# EAGLE board KittyEarsV2 (EAGLE 8.7.0)
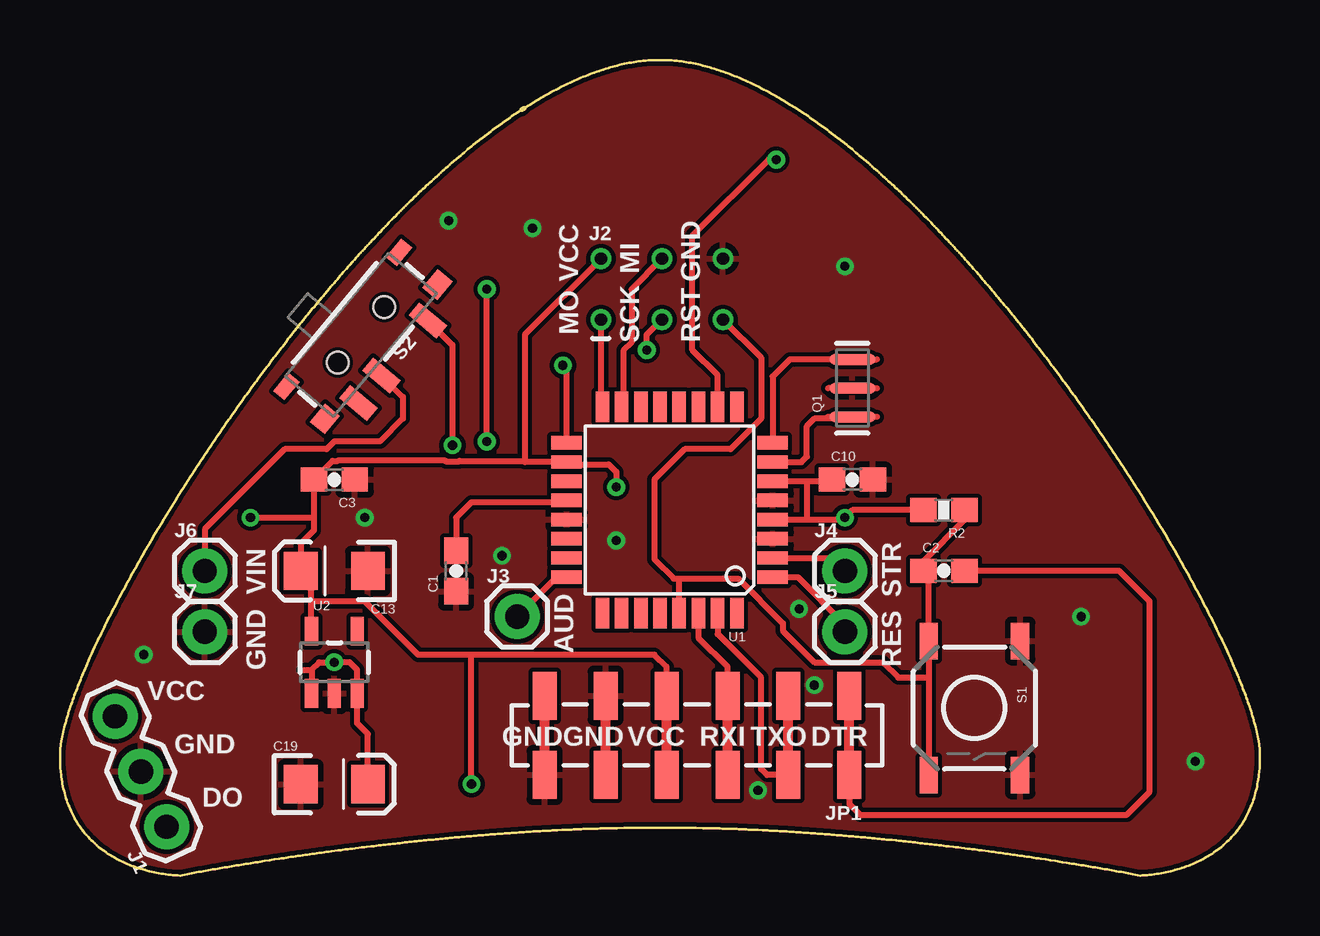
[diagram p0: board, top side]
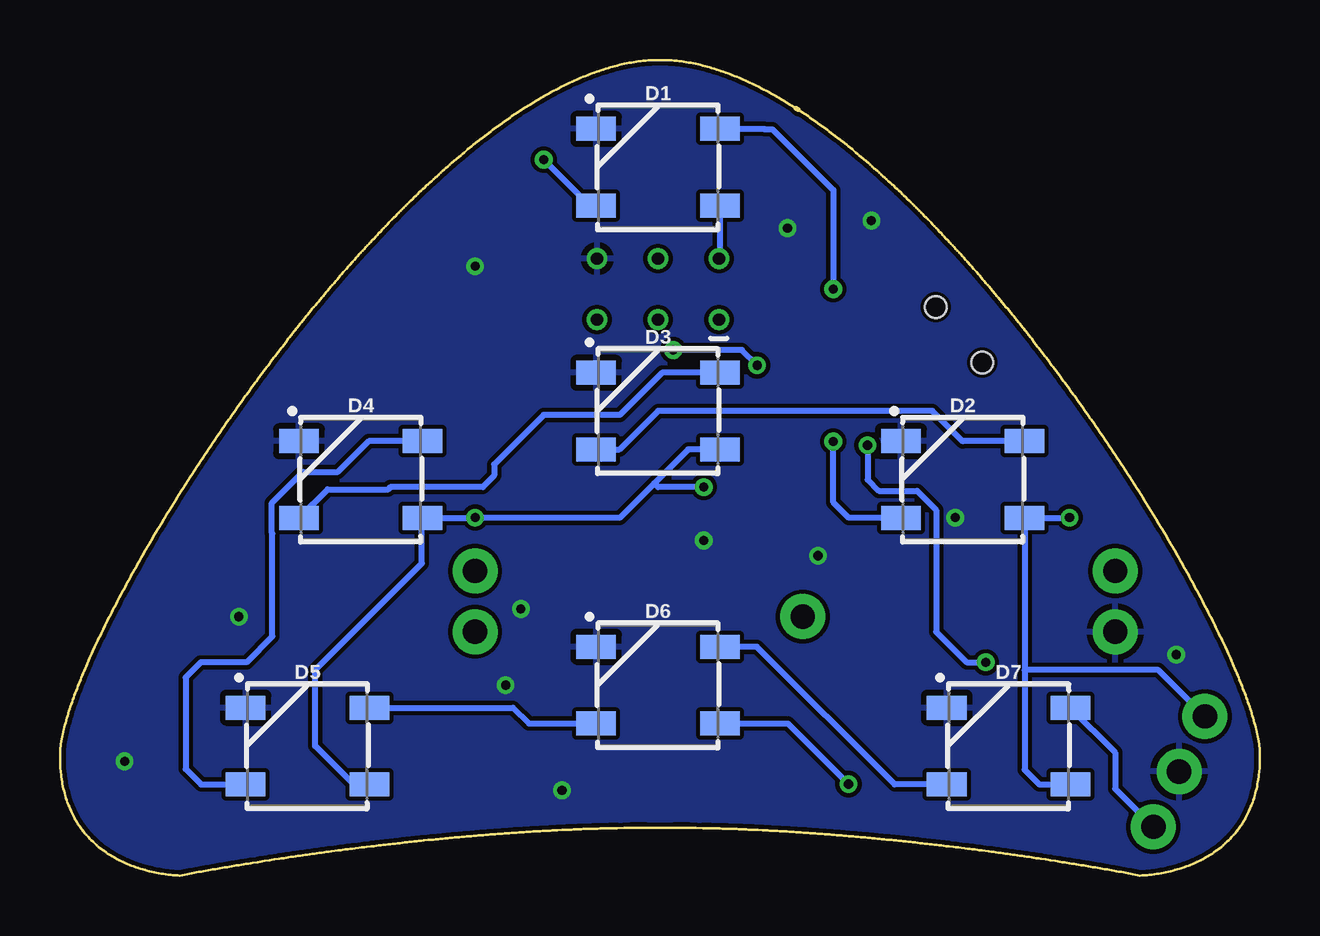
[diagram p1: board, bottom side, seen from below]

Size 50 x 34 mm. Coordinates in mm from the lower left corner, seen from the top.
Outline: 25.6,2 24.4,2 24.3,2 24.2,2 24.1,1.99 24,1.99 23.9,1.99 23.8,1.99 23.71,1.99 23.6,1.99 23.5,1.99 23.21,1.98 23.11,1.98 23.01,1.98 22.91,1.97 22.71,1.97 22.61,1.96 22.51,1.96 22.41,1.96 22.31,1.95 22.21,1.95 22.11,1.95 22.01,1.94 21.91,1.94 21.81,1.94 21.71,1.93 21.61,1.93 21.51,1.93 21.41,1.92 21.32,1.92 21.21,1.91 21.12,1.91 21.02,1.9 20.92,1.9 20.72,1.89 20.62,1.88 20.52,1.88 20.42,1.87 20.22,1.86 20.12,1.86 20.02,1.85 19.92,1.84 19.82,1.84 19.72,1.83 19.62,1.83 19.53,1.82 19.42,1.81 19.32,1.81 19.23,1.8 19.13,1.8 19.03,1.79 18.93,1.78 18.83,1.77 18.73,1.77 18.63,1.76 18.53,1.75 18.43,1.75 18.33,1.74 18.23,1.73 18.13,1.73 18.03,1.72 17.93,1.71 17.83,1.7 17.73,1.69 17.64,1.69 17.54,1.68 17.44,1.67 17.34,1.66 17.24,1.65 17.14,1.65 17.04,1.64 16.94,1.63 16.84,1.62 16.74,1.61 16.64,1.6 16.54,1.59 16.44,1.58 16.34,1.57 16.25,1.57 16.15,1.56 16.05,1.55 15.95,1.54 15.85,1.53 15.75,1.52 15.65,1.51 15.55,1.5 15.45,1.49 15.35,1.48 15.25,1.47 15.16,1.46 15.06,1.45 14.96,1.44 14.86,1.43 14.76,1.42 14.66,1.41 14.56,1.4 14.46,1.39 14.36,1.38 14.26,1.37 14.16,1.35 14.06,1.34 13.96,1.33 13.87,1.32 13.77,1.31 13.67,1.3 13.57,1.29 13.47,1.28 13.37,1.26 13.27,1.25 13.18,1.24 13.08,1.23 12.98,1.22 12.78,1.19 12.68,1.18 12.58,1.17 12.18,1.12 12.09,1.11 11.99,1.09 11.89,1.08 11.79,1.07 11.69,1.06 11.59,1.04 11.29,1.01 11.2,0.99 11.1,0.98 11,0.96 10.9,0.95 10.8,0.94 10.7,0.93 10.6,0.91 10.51,0.9 10.41,0.88 10.31,0.87 10.21,0.86 10.11,0.84 10.01,0.83 9.91,0.81 9.82,0.8 9.72,0.79 9.62,0.77 9.52,0.76 9.42,0.74 9.32,0.73 9.22,0.71 9.13,0.7 8.93,0.67 8.83,0.65 8.73,0.64 8.53,0.61 8.44,0.59 8.34,0.58 8.24,0.56 8.14,0.55 8.04,0.53 7.95,0.52 7.85,0.5 7.75,0.48 7.65,0.47 7.55,0.45 7.45,0.44 7.35,0.42 7.26,0.4 7.16,0.39 7.06,0.37 6.96,0.35 6.86,0.34 6.76,0.32 6.66,0.3 6.57,0.29 6.47,0.27 6.37,0.25 6.27,0.24 6.18,0.22 6.08,0.2 5.98,0.18 5.88,0.17 5.78,0.15 5.69,0.13 5.59,0.11 5.49,0.09 5.39,0.08 5.29,0.06 5.2,0.04 5.1,0.02 5,0 4.9,0 4.8,0.01 4.7,0.01 4.61,0.03 4.51,0.04 4.41,0.05 4.31,0.06 4.21,0.08 4.12,0.1 4.02,0.11 3.92,0.14 3.82,0.16 3.73,0.18 3.63,0.2 3.53,0.23 3.44,0.26 3.35,0.29 3.16,0.35 3.06,0.38 2.97,0.42 2.88,0.46 2.79,0.49 2.69,0.53 2.61,0.57 2.52,0.62 2.43,0.66 2.34,0.71 2.25,0.76 2.17,0.81 2.08,0.86 2,0.91 1.92,0.97 1.84,1.02 1.76,1.08 1.6,1.2 1.52,1.27 1.45,1.34 1.38,1.4 1.31,1.47 1.24,1.54 1.17,1.61 1.1,1.69 1.04,1.76 0.86,2 0.8,2.08 0.75,2.16 0.69,2.25 0.64,2.33 0.59,2.42 0.55,2.51 0.5,2.6 0.46,2.69 0.42,2.78 0.38,2.87 0.34,2.96 0.31,3.05 0.28,3.15 0.25,3.24 0.22,3.33 0.19,3.43 0.17,3.53 0.15,3.62 0.12,3.72 0.1,3.82 0.09,3.91 0.07,4.01 0.06,4.11 0.05,4.21 0.03,4.31 0.02,4.51 0.01,4.61 0,4.7 0,4.9 0,5 0,5.1 0.01,5.2 0.01,5.3 0.02,5.4 0.04,5.5 0.06,5.6 0.07,5.7 0.09,5.79 0.11,5.89 0.13,5.99 0.16,6.09 0.18,6.18 0.2,6.28 0.23,6.38 0.26,6.47 0.28,6.57 0.31,6.67 0.34,6.76 0.37,6.86 0.4,6.95 0.44,7.05 0.47,7.14 0.5,7.23 0.53,7.33 0.57,7.42 0.6,7.52 0.64,7.61 0.67,7.7 0.71,7.79 0.74,7.89 0.78,7.98 0.82,8.07 0.86,8.17 0.89,8.26 0.93,8.35 0.97,8.45 1.01,8.54 1.05,8.63 1.09,8.72 1.12,8.81 1.21,9 1.25,9.09 1.29,9.18 1.33,9.27 1.37,9.36 1.45,9.54 1.5,9.63 1.54,9.72 1.58,9.81 1.62,9.9 1.67,9.99 1.71,10.08 1.75,10.18 1.8,10.26 1.84,10.35 1.89,10.44 1.93,10.53 1.98,10.62 2.02,10.71 2.06,10.8 2.11,10.89 2.16,10.98 2.2,11.07 2.29,11.24 2.34,11.33 2.38,11.42 2.43,11.51 2.48,11.6 2.52,11.69 2.57,11.78 2.62,11.86 2.67,11.95 2.71,12.04 2.76,12.13 2.81,12.21 2.86,12.3 2.9,12.39 2.95,12.48 3,12.56 3.05,12.65 3.1,12.74 3.15,12.83 3.19,12.92 3.24,13 3.29,13.09 3.34,13.18 3.39,13.26 3.49,13.44 3.54,13.52 3.59,13.61 3.64,13.7 3.69,13.78 3.74,13.87 3.84,14.04 3.89,14.13 4.1,14.47 4.15,14.56 4.2,14.64 4.25,14.73 4.3,14.81 4.36,14.9 4.41,14.99 4.46,15.07 4.51,15.16 4.56,15.24 4.62,15.33 4.67,15.41 4.72,15.5 4.78,15.58 4.83,15.67 4.88,15.75 4.93,15.83 4.99,15.92 5.04,16 5.09,16.09 5.15,16.17 5.2,16.26 5.25,16.34 5.31,16.43 5.36,16.51 5.41,16.59 5.47,16.68 5.53,16.76 5.58,16.84 5.63,16.93 5.69,17.01 5.74,17.1 5.8,17.18 5.85,17.26 5.91,17.35 5.96,17.43 6.02,17.51 6.07,17.6 6.13,17.68 6.18,17.77 6.24,17.85 6.29,17.93 6.35,18.01 6.41,18.09 6.46,18.18 6.52,18.26 6.58,18.34 6.63,18.43 6.69,18.51 6.74,18.59 6.8,18.67 6.86,18.75 6.91,18.84 6.97,18.92 7.03,19 7.09,19.08 7.14,19.16 7.2,19.25 7.26,19.33 7.32,19.41 7.37,19.49 7.43,19.57 7.49,19.66 7.55,19.74 7.61,19.82 7.66,19.9 7.72,19.98 7.78,20.06 7.84,20.14 7.9,20.22 7.96,20.3 8.02,20.38 8.08,20.46 8.13,20.55 8.19,20.62 8.25,20.71 8.31,20.79 8.37,20.87 8.43,20.95 8.49,21.03 8.55,21.11 8.61,21.19 8.67,21.27 8.73,21.35 8.79,21.43 8.85,21.51 8.91,21.59 8.97,21.67 9.03,21.75 9.09,21.83 9.21,21.98 9.28,22.06 9.34,22.14 9.4,22.22 9.52,22.38 9.58,22.46 9.64,22.54 9.71,22.61 9.77,22.69 9.89,22.85 9.95,22.93 10.02,23 10.08,23.08 10.14,23.16 10.2,23.24 10.27,23.32 10.33,23.39 10.39,23.47 10.46,23.55 10.52,23.63 10.58,23.7 10.65,23.78 10.9,24.09 10.96,24.17 11.03,24.24 11.16,24.39 11.22,24.47 11.29,24.55 11.35,24.62 11.42,24.7 11.48,24.77 11.55,24.85 11.61,24.93 11.68,25 11.75,25.08 11.81,25.15 11.94,25.3 12.01,25.38 12.08,25.45 12.21,25.6 12.27,25.68 12.34,25.75 12.41,25.82 12.47,25.9 12.54,25.97 12.61,26.05 12.68,26.12 12.74,26.2 12.81,26.27 12.88,26.34 12.95,26.42 13.02,26.49 13.08,26.56 13.15,26.63 13.22,26.71 13.29,26.78 13.36,26.85 13.43,26.92 13.5,27 13.56,27.07 13.63,27.14 13.7,27.21 13.84,27.36 13.91,27.43 13.98,27.5 14.05,27.57 14.12,27.64 14.19,27.71 14.26,27.78 14.33,27.85 14.4,27.93 14.47,27.99 14.55,28.06 14.62,28.13 14.69,28.2 14.76,28.27 14.83,28.34 14.91,28.41 14.98,28.48 15.05,28.55 15.12,28.62 15.2,28.69 15.27,28.75 15.34,28.82 15.41,28.89 15.49,28.96 15.56,29.03 15.64,29.09 15.71,29.16 15.78,29.23 15.86,29.29 15.93,29.36 16.01,29.43 16.08,29.49 16.16,29.56 16.23,29.63 16.31,29.69 16.38,29.76 16.54,29.89 16.69,30.02 16.76,30.08 16.84,30.14 17,30.27 17.07,30.34 17.15,30.4 17.23,30.46 17.31,30.52 17.38,30.58 17.46,30.65 17.62,30.77 17.7,30.83 17.78,30.89 17.86,30.95 17.94,31.01 18.02,31.07 18.1,31.13 18.18,31.19 18.26,31.25 18.34,31.31 18.42,31.37 18.5,31.43 18.59,31.48 18.67,31.54 18.75,31.59 18.83,31.65 18.91,31.71 19,31.77 19.08,31.82 19.25,31.93 19.33,31.98 19.42,32.04 19.5,32.09 19.59,32.14 19.67,32.2 19.76,32.25 19.84,32.3 19.93,32.35 20.02,32.4 20.1,32.45 20.19,32.5 20.27,32.55 20.36,32.6 20.45,32.65 20.54,32.7 20.71,32.79 20.8,32.83 20.89,32.88 20.98,32.92 21.07,32.97 21.16,33.01 21.25,33.05 21.34,33.1 21.43,33.14 21.52,33.18 21.62,33.22 21.71,33.26 21.8,33.29 21.89,33.33 21.99,33.37 22.08,33.41 22.17,33.44 22.27,33.48 22.36,33.51 22.45,33.54 22.55,33.57 22.64,33.6 22.74,33.63 22.84,33.66 22.93,33.69 23.03,33.72 23.12,33.74 23.22,33.77 23.32,33.79 23.42,33.81 23.51,33.84 23.61,33.86 23.71,33.88 23.81,33.89 23.91,33.91 24,33.92 24.1,33.94 24.2,33.95 24.3,33.96 24.4,33.97 24.5,33.98 24.6,33.99 24.7,33.99 24.8,34 24.9,34 25,34 25.1,34 25.2,34 25.3,33.99 25.4,33.99 25.5,33.98 25.6,33.97 25.7,33.96 25.8,33.95 25.9,33.94 26,33.92 26.09,33.91 26.19,33.89 26.29,33.88 26.39,33.86 26.49,33.84 26.59,33.81 26.68,33.79 26.78,33.77 26.88,33.74 26.97,33.72 27.07,33.69 27.16,33.66 27.26,33.63 27.36,33.6 27.45,33.57 27.55,33.54 27.64,33.51 27.73,33.48 27.83,33.44 27.92,33.41 28.02,33.37 28.11,33.33 28.2,33.29 28.29,33.26 28.38,33.22 28.48,33.18 28.57,33.14 28.66,33.1 28.75,33.05 28.84,33.01 28.93,32.97 29.02,32.92 29.11,32.88 29.2,32.83 29.29,32.79 29.46,32.7 29.55,32.65 29.64,32.6 29.73,32.55 29.81,32.5 29.9,32.45 29.99,32.4 30.07,32.35 30.16,32.3 30.24,32.25 30.33,32.2 30.41,32.14 30.5,32.09 30.58,32.04 30.67,31.98 30.75,31.93 30.92,31.82 31,31.77 31.08,31.71 31.17,31.65 31.25,31.59 31.33,31.54 31.42,31.48 31.5,31.43 31.58,31.37 31.66,31.31 31.74,31.25 31.82,31.19 31.9,31.13 31.98,31.07 32.06,31.01 32.14,30.95 32.22,30.89 32.3,30.83 32.38,30.77 32.54,30.65 32.62,30.58 32.69,30.52 32.77,30.46 32.85,30.4 32.93,30.34 33,30.27 33.16,30.14 33.24,30.08 33.31,30.02 33.46,29.89 33.62,29.76 33.69,29.69 33.77,29.63 33.84,29.56 33.92,29.49 33.99,29.43 34.07,29.36 34.14,29.29 34.22,29.23 34.29,29.16 34.36,29.09 34.44,29.03 34.51,28.96 34.58,28.89 34.66,28.82 34.73,28.75 34.8,28.69 34.88,28.62 34.95,28.55 35.02,28.48 35.09,28.41 35.17,28.34 35.24,28.27 35.31,28.2 35.38,28.13 35.45,28.06 35.52,27.99 35.6,27.93 35.67,27.85 35.74,27.78 35.81,27.71 35.88,27.64 35.95,27.57 36.02,27.5 36.09,27.43 36.16,27.36 36.3,27.21 36.37,27.14 36.44,27.07 36.5,27 36.57,26.92 36.64,26.85 36.71,26.78 36.78,26.71 36.85,26.63 36.92,26.56 36.98,26.49 37.05,26.42 37.12,26.34 37.19,26.27 37.26,26.2 37.32,26.12 37.39,26.05 37.46,25.97 37.53,25.9 37.59,25.82 37.66,25.75 37.73,25.68 37.79,25.6 37.92,25.45 37.99,25.38 38.06,25.3 38.19,25.15 38.25,25.08 38.32,25 38.39,24.93 38.45,24.85 38.52,24.77 38.58,24.7 38.65,24.62 38.71,24.55 38.78,24.47 38.84,24.39 38.9,24.32 38.97,24.24 39.03,24.17 39.1,24.09 39.22,23.93 39.29,23.86 39.35,23.78 39.42,23.7 39.48,23.63 39.54,23.55 39.61,23.47 39.67,23.39 39.73,23.32 39.8,23.24 39.86,23.16 39.92,23.08 39.98,23 40.05,22.93 40.11,22.85 40.23,22.69 40.29,22.61 40.36,22.54 40.42,22.46 40.48,22.38 40.6,22.22 40.66,22.14 40.72,22.06 40.78,21.98 40.85,21.91 40.91,21.83 40.97,21.75 41.03,21.67 41.09,21.59 41.15,21.51 41.21,21.43 41.27,21.35 41.33,21.27 41.39,21.19 41.45,21.11 41.51,21.03 41.57,20.95 41.63,20.87 41.69,20.79 41.75,20.71 41.81,20.62 41.87,20.55 41.92,20.46 41.99,20.38 42.04,20.3 42.1,20.22 42.16,20.14 42.22,20.06 42.28,19.98 42.34,19.9 42.39,19.82 42.45,19.74 42.51,19.66 42.57,19.57 42.63,19.49 42.68,19.41 42.74,19.33 42.8,19.25 42.86,19.16 42.91,19.08 42.97,19 43.03,18.92 43.09,18.84 43.14,18.75 43.2,18.67 43.26,18.59 43.31,18.51 43.37,18.43 43.42,18.34 43.48,18.26 43.54,18.18 43.59,18.09 43.65,18.01 43.71,17.93 43.76,17.85 43.82,17.77 43.87,17.68 43.93,17.6 43.98,17.51 44.04,17.43 44.09,17.35 44.15,17.26 44.2,17.18 44.26,17.1 44.31,17.01 44.37,16.93 44.42,16.84 44.47,16.76 44.53,16.68 44.58,16.59 44.64,16.51 44.69,16.43 44.75,16.34 44.8,16.26 44.85,16.17 44.91,16.09 44.96,16 45.01,15.92 45.07,15.83 45.12,15.75 45.17,15.67 45.23,15.58 45.28,15.5 45.33,15.41 45.38,15.33 45.44,15.24 45.49,15.16 45.54,15.07 45.59,14.99 45.64,14.9 45.7,14.81 45.75,14.73 45.8,14.64 45.85,14.56 45.9,14.47 46.11,14.13 46.16,14.04 46.26,13.87 46.31,13.78 46.36,13.7 46.41,13.61 46.46,13.52 46.51,13.44 46.61,13.26 46.66,13.18 46.71,13.09 46.75,13 46.8,12.92 46.85,12.83 46.9,12.74 46.95,12.65 47,12.56 47.05,12.48 47.09,12.39 47.14,12.3 47.19,12.21 47.24,12.13 47.29,12.04 47.33,11.95 47.38,11.86 47.43,11.78 47.47,11.69 47.52,11.6 47.57,11.51 47.61,11.42 47.66,11.33 47.71,11.24 47.75,11.16 47.8,11.07 47.84,10.98 47.89,10.89 47.93,10.8 47.98,10.71 48.02,10.62 48.07,10.53 48.11,10.44 48.2,10.26 48.24,10.18 48.29,10.08 48.33,9.99 48.38,9.9 48.42,9.81 48.46,9.72 48.5,9.63 48.55,9.54 48.63,9.36 48.67,9.27 48.71,9.18 48.75,9.09 48.79,9 48.88,8.81 48.91,8.72 48.95,8.63 48.99,8.54 49.03,8.45 49.07,8.35 49.11,8.26 49.14,8.17 49.18,8.07 49.22,7.98 49.26,7.89 49.29,7.79 49.33,7.7 49.36,7.61 49.4,7.52 49.43,7.42 49.47,7.33 49.5,7.23 49.53,7.14 49.56,7.05 49.6,6.95 49.63,6.86 49.66,6.76 49.68,6.67 49.71,6.57 49.74,6.47 49.77,6.38 49.8,6.28 49.82,6.18 49.84,6.09 49.87,5.99 49.89,5.89 49.91,5.79 49.93,5.7 49.94,5.6 49.96,5.5 49.97,5.4 49.98,5.3 49.99,5.2 50,5.1 50,5 50,4.9 49.99,4.7 49.99,4.61 49.98,4.51 49.97,4.31 49.95,4.21 49.94,4.11 49.93,4.01 49.91,3.91 49.9,3.82 49.88,3.72 49.85,3.62 49.83,3.53 49.81,3.43 49.78,3.33 49.75,3.24 49.72,3.15 49.69,3.05 49.65,2.96 49.62,2.87 49.58,2.78 49.54,2.69 49.5,2.6 49.45,2.51 49.41,2.42 49.36,2.33 49.31,2.25 49.25,2.16 49.2,2.08 49.14,2 48.96,1.76 48.9,1.69 48.83,1.61 48.76,1.54 48.69,1.47 48.62,1.4 48.48,1.27 48.4,1.2 48.24,1.08 48.16,1.02 48.08,0.97 48,0.91 47.92,0.86 47.83,0.81 47.75,0.76 47.66,0.71 47.57,0.66 47.48,0.62 47.39,0.57 47.3,0.53 47.21,0.49 47.12,0.46 47.03,0.42 46.94,0.38 46.84,0.35 46.75,0.32 46.66,0.29 46.56,0.26 46.47,0.23 46.37,0.2 46.27,0.18 46.18,0.16 46.08,0.14 45.98,0.11 45.88,0.1 45.79,0.08 45.69,0.06 45.59,0.05 45.49,0.04 45.39,0.03 45.3,0.01 45.2,0.01 45.1,0 45,0 44.9,0.02 44.8,0.04 44.71,0.06 44.61,0.08 44.51,0.09 44.41,0.11 44.31,0.13 44.22,0.15 44.12,0.17 44.02,0.18 43.92,0.2 43.82,0.22 43.73,0.24 43.63,0.25 43.53,0.27 43.43,0.29 43.33,0.3 43.24,0.32 43.14,0.34 43.04,0.35 42.94,0.37 42.84,0.39 42.74,0.4 42.65,0.42 42.55,0.44 42.45,0.45 42.35,0.47 42.25,0.48 42.15,0.5 42.05,0.52 41.96,0.53 41.76,0.56 41.66,0.58 41.56,0.59 41.47,0.61 41.27,0.64 41.17,0.65 41.07,0.67 40.87,0.7 40.78,0.71 40.68,0.73 40.58,0.74 40.48,0.76 40.38,0.77 40.28,0.79 40.18,0.8 40.09,0.81 39.99,0.83 39.89,0.84 39.79,0.86 39.69,0.87 39.59,0.88 39.49,0.9 39.39,0.91 39.3,0.93 39.2,0.94 39.1,0.95 39,0.96 38.9,0.98 38.8,0.99 38.7,1.01 38.41,1.04 38.31,1.06 38.21,1.07 38.11,1.08 38.01,1.09 37.91,1.11 37.82,1.12 37.42,1.17 37.32,1.18 37.22,1.19 37.02,1.22 36.92,1.23 36.82,1.24 36.73,1.25 36.63,1.26 36.53,1.28 36.43,1.29 36.33,1.3 36.23,1.31 36.13,1.32 36.03,1.33 35.94,1.34 35.84,1.35 35.74,1.37 35.64,1.38 35.54,1.39 35.44,1.4 35.34,1.41 35.24,1.42 35.14,1.43 35.04,1.44 34.94,1.45 34.85,1.46 34.65,1.48 34.55,1.49 34.45,1.5 34.35,1.51 34.25,1.52 34.15,1.53 34.05,1.54 33.95,1.55 33.85,1.56 33.75,1.57 33.65,1.57 33.56,1.58 33.46,1.59 33.36,1.6 33.26,1.61 33.16,1.62 33.06,1.63 32.96,1.64 32.86,1.65 32.76,1.65 32.66,1.66 32.56,1.67 32.46,1.68 32.36,1.69 32.27,1.69 32.17,1.7 32.06,1.71 31.97,1.72 31.87,1.73 31.77,1.73 31.67,1.74 31.57,1.75 31.47,1.75 31.37,1.76 31.27,1.77 31.17,1.77 31.07,1.78 30.97,1.79 30.87,1.8 30.78,1.8 30.68,1.81 30.58,1.81 30.48,1.82 30.38,1.83 30.28,1.83 30.18,1.84 30.08,1.84 29.98,1.85 29.88,1.86 29.78,1.86 29.58,1.87 29.48,1.88 29.38,1.88 29.28,1.89 29.08,1.9 28.98,1.9 28.89,1.91 28.79,1.91 28.68,1.92 28.59,1.92 28.49,1.93 28.39,1.93 28.29,1.93 28.19,1.94 28.09,1.94 27.99,1.94 27.89,1.95 27.79,1.95 27.69,1.95 27.59,1.96 27.49,1.96 27.39,1.96 27.29,1.97 27.19,1.97 27.09,1.97 26.99,1.98 26.89,1.98 26.79,1.98 26.5,1.99 26.4,1.99 26.29,1.99 26.2,1.99 26.1,1.99 26,1.99 25.9,1.99 25.8,2 25.7,2 25.6,2
Copper layers (1*16): Top 0.035mm / dielectric 1.5mm / Bottom 0.035mm
Design rules "SparkFun-2-layer-TIGHT": minimum track width 7mil, minimum drill 15mil, track to track 7mil, track to pad 7mil, pad to pad 7mil, via to via 7mil, smd to smd 7mil, copper to edge 7mil, drill to drill 7mil, minimum pad ring 7mil, minimum via ring 7mil, stop-mask expansion 4mil, vias tented up to drill 25mil, thermal gap 10mil
Net classes: 0 default: width 0.203 mm; 1 vcc: width 0.254 mm

## Footprints (pad centres in the part's own frame; a part is rotated, then mirrored left to right if it is on the bottom)
0603-CAP = smd 1.1 x 1: 1 -0.85,0; 2 0.85,0
EIA3216 = smd 1.4 x 1.6: A 1.4,0; C -1.4,0
WS2812B = smd 1.651 x 1: 1 2.577,-1.6; 2 2.577,1.6; 3 -2.577,1.6; 4 -2.577,-1.6
1X03 = drill 1.016 pad 1.88: 1 0,0; 2 2.54,0; 3 5.08,0
2X3_TEST_POINTS = drill 0.508: 1 -2.54,-1.27; 2 -2.54,1.27; 3 0,-1.27; 4 0,1.27; 5 2.54,-1.27; 6 2.54,1.27
1X01 = drill 1.016 pad 1.88: 1 0,0
1X06_SMD_STRAIGHT_COMBO = smd 1 x 2: 1 0,-1.65; 1-2 0,1.65; 2 2.54,1.65; 2-2 2.54,-1.65; 3 5.08,-1.65; 3-2 5.08,1.65; 4 7.62,1.65; 4-2 7.62,-1.65; 5 10.16,-1.65; 5-2 10.16,1.65; 6 12.7,1.65; 6-2 12.7,-1.65
RESONATOR-SMD-1:1 = smd 0.45 x 1.905: 1 -1.2,0; 2 0,0; 3 1.2,0
0603-RES = smd 1.1 x 1: 1 -0.85,0; 2 0.85,0
TACTILE-SWITCH-SMD-ALT01 = smd 1.524 x 0.762: 1 -2.794,1.905; 2 2.794,1.905; 3 -2.794,-1.905; 4 2.794,-1.905
SWITCH_SPST_SMD_A = smd 0.7 x 1.5: 1 -2.25,-1.75; 2 -0.75,-1.75; 3 2.25,-1.75 | smd 1 x 0.6: GND1 -3.65,1; GND3 3.65,1 | smd 1 x 0.8: GND2 -3.65,-1.1; GND4 3.65,-1.1 | hole 0.9: -1.5,0; 1.5,0
TQFP32-08 = smd 1.27 x 0.559: 1 -4.293,2.8; 2 -4.293,2; 3 -4.293,1.2; 4 -4.293,0.4; 5 -4.293,-0.4; 6 -4.293,-1.2; 7 -4.293,-2; 8 -4.293,-2.8; 17 4.293,-2.8; 18 4.293,-2; 19 4.293,-1.2; 20 4.293,-0.4; 21 4.293,0.4; 22 4.293,1.2; 23 4.293,2; 24 4.293,2.8 | smd 0.559 x 1.27: 9 -2.8,-4.293; 10 -2,-4.293; 11 -1.2,-4.293; 12 -0.4,-4.293; 13 0.4,-4.293; 14 1.2,-4.293; 15 2,-4.293; 16 2.8,-4.293; 25 2.8,4.293; 26 2,4.293; 27 1.2,4.293; 28 0.4,4.293; 29 -0.4,4.293; 30 -1.2,4.293; 31 -2,4.293; 32 -2.8,4.293
SOT23-5 = smd 0.55 x 1.2: 1 -0.95,-1.3; 2 0,-1.3; 3 0.95,-1.3; 4 0.95,1.3; 5 -0.95,1.3

## Placement (x,y rotation side)
C1  0.1uF  [0603-CAP]  16.51,12.7 90 top
C2  0.1uF  [0603-CAP]  36.83,12.7 0 top
C3  0.1uF  [0603-CAP]  11.43,16.51 180 top
C10  0.1uF  [0603-CAP]  33.02,16.51 0 top
C13  10uF  [EIA3216]  11.43,12.7 180 top
C19  10uF  [EIA3216]  11.43,3.81 0 top
D1  WS2812B  [WS2812B]  25.08,29.53 0 bottom
D2  WS2812B  [WS2812B]  12.38,16.51 0 bottom
D3  WS2812B  [WS2812B]  25.08,19.37 0 bottom
D4  WS2812B  [WS2812B]  37.46,16.51 0 bottom
D5  WS2812B  [WS2812B]  39.69,5.4 0 bottom
D6  WS2812B  [WS2812B]  25.08,7.94 0 bottom
D7  WS2812B  [WS2812B]  10.48,5.4 0 bottom
FRAME1  FRAME-LEDGER  [CREATIVE_COMMONS]  20.32,-8.89 0 top  (outside the outline)
J1  455-1750-1-ND  [1X03]  4.45,2.03 115 top
J2  AVR_SPI_PROG_3X2TESTPOINTS  [2X3_TEST_POINTS]  25.08,24.45 0 top
J3  [1X01]  19.05,10.79 0 top
J4  [1X01]  32.7,12.7 0 top
J5  [1X01]  32.7,10.16 0 top
J6  [1X01]  6.03,12.7 0 top
J7  [1X01]  6.03,10.16 0 top
JP1  FTDI Basic  [1X06_SMD_STRAIGHT_COMBO]  32.89,5.84 180 top
Q1  8/16/20MHz  [RESONATOR-SMD-1:1]  33.02,20.32 90 top
R2  10K  [0603-RES]  36.83,15.24 180 top
S1  Reset  [TACTILE-SWITCH-SMD-ALT01]  38.1,6.99 270 top
S2  [SWITCH_SPST_SMD_A]  12.54,22.54 50 top
U1  ATMEGA328  [TQFP32-08]  25.4,15.24 180 top
U2  MIC5205  [SOT23-5]  11.43,8.89 0 top

## Library data of the parts
C1-C3 C10 C13 C19 R2 U1 U2 = SparkFun
D1-D7 = SparkFun-LED; PROD_ID: DIO-12503
FRAME1 = SparkFun-Aesthetics
J1-J7 = SparkFun-Connectors
JP1 = SparkFun-Connectors; PROD_ID: CONN-10203
Q1 S1 = Testing
S2 = SparkFun-Switches; PROD_ID: SWCH-10651; SF_SKU: COM-10860

## Nets
A0: U1.23
A1: J3.1 U1.24
A2: U1.25
A3: U1.26
A6: U1.19
A7: U1.22
AREF: C1.2 U1.20
D2: U1.32
D3: J5.1 U1.1
D4: J4.1 U1.2
D5: U1.9
D6: D1.4 U1.10
D7: U1.11
D8: U1.12
D9: U1.13
D10: U1.14
DO: D7.2 J1.1
DTR: C2.2 JP1.1
GND: C1.1 C3.1 C10.2 C13.C C19.C D1.3 D2.3 D3.3 D4.3 D5.3 D6.3 D7.3 J1.2 J2.6 J7.1 JP1.5 JP1.6 Q1.2 S1.1 S1.2 U1.3 U1.5 U1.21 U2.2
MISO: J2.1 U1.16
MOSI: J2.4 U1.15
N$1: Q1.3 U1.8
N$2: Q1.1 U1.7
N$5: D1.2 D2.4
N$6: D2.2 D3.4
N$7: D3.2 D4.4
N$8: D4.2 D5.4
N$9: D5.2 D6.4
N$10: D6.2 D7.4
RAW [vcc]: C19.A S2.3 U2.1 U2.3
RESET: C2.1 J2.5 R2.1 S1.3 S1.4 U1.29
RXI: JP1.3 U1.30
SCK: J2.3 U1.17
TXO: JP1.2 U1.31
VCC: C3.2 C10.1 C13.A D1.1 D2.1 D3.1 D4.1 D5.1 D6.1 D7.1 J1.3 J2.2 JP1.4 R2.2 U1.4 U1.6 U1.18 U2.5
VIN [vcc]: J6.1 S2.2

## Tracks (layer width: path | path; a pad name or v marks a point on that pad's centre or on a via)
A1
  Top 0.254: U1.24 20.7,12.44 J3.1
AREF
  Top 0.254: U1.20 21.03,15.56 17.14,15.56 16.51,14.92 C1.2
D3
  Top 0.254: U1.1 30.74,12.44 32.7,10.48 J5.1
D4
  Top 0.254: U1.2 32.16,13.24 J4.1
D6  (via drill 0.38)
  Top 0.254: U1.10 27.4,20.86 26.35,21.91 26.35,26.67 29.53,29.84 v29.84,29.84
  Bottom 0.254: D1.4 27.93,27.93 v29.84,29.84
DO
  Bottom 0.254: D7.2 6.03,5.13 6.03,3.62 J1.1
DTR
  Top 0.254: JP1.1 32.89,2.98 33.34,2.54 44.45,2.54 45.4,3.49 45.4,11.43 44.13,12.7 C2.2
GND  (via drill 0.38)
  other vias: 30.8,11.11 12.7,14.92 18.41,13.34 3.49,9.21 16.19,27.3 32.7,25.4 23.18,13.97 42.54,10.79 47.31,4.76 19.68,26.99 31.43,7.94 29.08,3.56
  pour Top: -1.27,0 -1.27,36.83 50.8,36.83 50.8,0
  pour Bottom: -1.27,0 -1.27,36.83 50.8,36.83 50.8,0
MISO
  Top 0.254: U1.16 22.54,19.59 J2.1
MOSI
  Top 0.254: J2.4 23.81,24.45 23.81,22.23 23.5,21.91 23.5,19.63 U1.15
N$1
  Top 0.254: Q1.3 30.41,21.52 29.69,20.8 U1.8
N$2
  Top 0.254: Q1.1 32.95,19.05 31.43,19.05 31.11,18.73 31.11,17.46 30.89,17.24 U1.7
N$5  (via drill 0.38)
  Top 0.254: v17.78,18.1 v17.78,24.45
  Bottom 0.254: D1.2 20.65,31.13 20.64,31.11 20.32,31.11 17.78,28.57 v17.78,24.45 | D2.4 17.13,14.91 17.78,15.56 v17.78,18.1
N$6
  Bottom 0.254: D3.4 26.68,17.77 25.08,19.37 13.65,19.37 12.38,18.1 12.37,18.11 D2.2
N$7
  Bottom 0.254: D4.4 38.85,16.1 36.32,16.1 36.23,16.19 32.38,16.19 31.91,16.67 31.91,17.14 29.84,19.21 26.67,19.21 24.91,20.97 D3.2
N$8
  Bottom 0.254: D5.4 44.12,3.8 44.77,4.45 44.77,8.26 44.13,8.89 42.23,8.89 41.15,9.97 41.15,14.26 41.17,14.28 41.17,15.54 39.88,16.83 38.42,16.83 37.13,18.11 D4.2
N$9
  Bottom 0.254: D5.2 31.13,7 30.47,6.34 D6.4
N$10
  Bottom 0.254: D7.4 15.23,3.8 20.97,9.54 D6.2
RAW  (via drill 0.38)
  Top 0.254: C19.A 12.83,5.9 12.38,6.35 U2.3 12.38,8.57 12.07,8.89 v11.43,8.89 10.79,8.89 10.48,8.57 | 10.48,8.57 U2.1 | 10.16,8.57 10.48,8.57 | S2.3 16.35,22.12 v16.35,17.94
  Bottom 0.254: 16.35,17.78 v16.35,17.94 16.35,16.51 15.88,16.03 14.29,16.03 13.49,15.24 13.49,10.16 12.22,8.89 v11.43,8.89
RESET
  Top 0.254: 36.2,8.26 S1.3 36.2,12.48 C2.1 35.98,13.12 37.68,14.82 R2.1 | 36.2,8.26 S1.4 | J2.5 29.21,21.59 29.21,19.05 27.94,17.78 26.04,17.78 24.77,16.51 24.77,13.18 25.57,12.38 25.78,12.38 | U1.29 25.8,12.36 25.78,12.38 | 25.78,12.38 28.26,12.38 30.12,10.52 30.12,10.2 31.43,8.89 34.29,8.89 34.92,8.26 36.2,8.26
RXI
  Top 0.254: U1.30 26.6,9.91 27.81,8.7 JP1.3
SCK  (via drill 0.38)
  Top 0.254: J2.3 24.45,22.54 v24.45,21.91 | U1.17 21.11,21.12 v20.96,21.27
  Bottom 0.254: v24.45,21.91 21.59,21.91 v20.96,21.27
TXO
  Top 0.254: U1.31 27.4,10.06 29.21,8.26 29.21,4.45 29.46,4.19 JP1.2
VCC  (via drill 0.38)
  Top 0.254: 10.58,14.92 C3.2 11.36,17.29 11.58,17.29 11.6,17.32 16.02,17.32 16.07,17.27 16.63,17.27 16.65,17.29 19.32,17.29 19.37,17.24 | 10.58,14.92 10.58,14.39 10.03,13.84 10.03,13.02 | 10.03,13.02 C13.A | U2.5 10.48,11.43 | 10.03,13.02 10.48,12.57 10.48,11.43 | U1.6 31.11,16.44 | 31.11,16.44 32.1,16.44 C10.1 | 19.37,17.24 U1.18 21.2,17.14 22.86,17.14 23.18,16.83 v23.18,16.19 | JP1.4 25.27,8.7 24.77,9.21 17.14,9.21 | 17.14,9.21 14.92,9.21 12.7,11.43 10.48,11.43 | U1.4 31.11,14.84 | 31.11,14.84 32.62,14.84 v32.7,14.92 33.02,15.24 R2.2 | 31.11,16.44 31.11,14.84 | v17.14,3.81 17.14,9.21 | v7.94,14.92 10.58,14.92 | J2.2 19.37,22.54 19.37,17.24
  Bottom 0.254: 9.8,8.57 D2.1 v7.95,14.91 v7.94,14.92 | 9.8,8.57 9.8,4.41 9.2,3.8 D7.1 | D1.1 22.51,25.75 J2.2 | D5.1 37.77,3.8 39.37,5.4 39.37,8.57 34.92,13.02 34.92,14.87 D4.1 32.71,14.91 | 32.71,14.91 v32.7,14.92 | D6.1 19.67,6.34 v17.14,3.81 | D3.1 23.82,17.77 25.24,16.35 | 32.71,14.91 26.68,14.91 25.24,16.35 | v23.18,16.19 25.08,16.19 25.24,16.35 | J1.3 4.23,8.57 9.8,8.57
VIN
  Top 0.254: S2.2 14.29,19.95 14.29,19.05 13.34,18.1 11.43,18.1 11.11,17.78 9.37,17.78 6.03,14.45 J6.1

## Text on the board
tPlace: VCC | MI | GND | MO | SCK | RST | VIN | STR | AUD | GND | RES | VCC | GND | GND | GND | VCC | RXI | TXO | DTR | DO